# Altium PCB PCB1.PcbDoc
Units mil, origin at the board's own origin, x right, y up, seen from the top; angles counter-clockwise.
Board outline 3150 x 2748.11 mil, 4 copper layers (Top Layer, GROUND, POWER, Bottom Layer), stack 23.756 mil thick; 83 components, 48 nets, 343 pads, 175 vias.
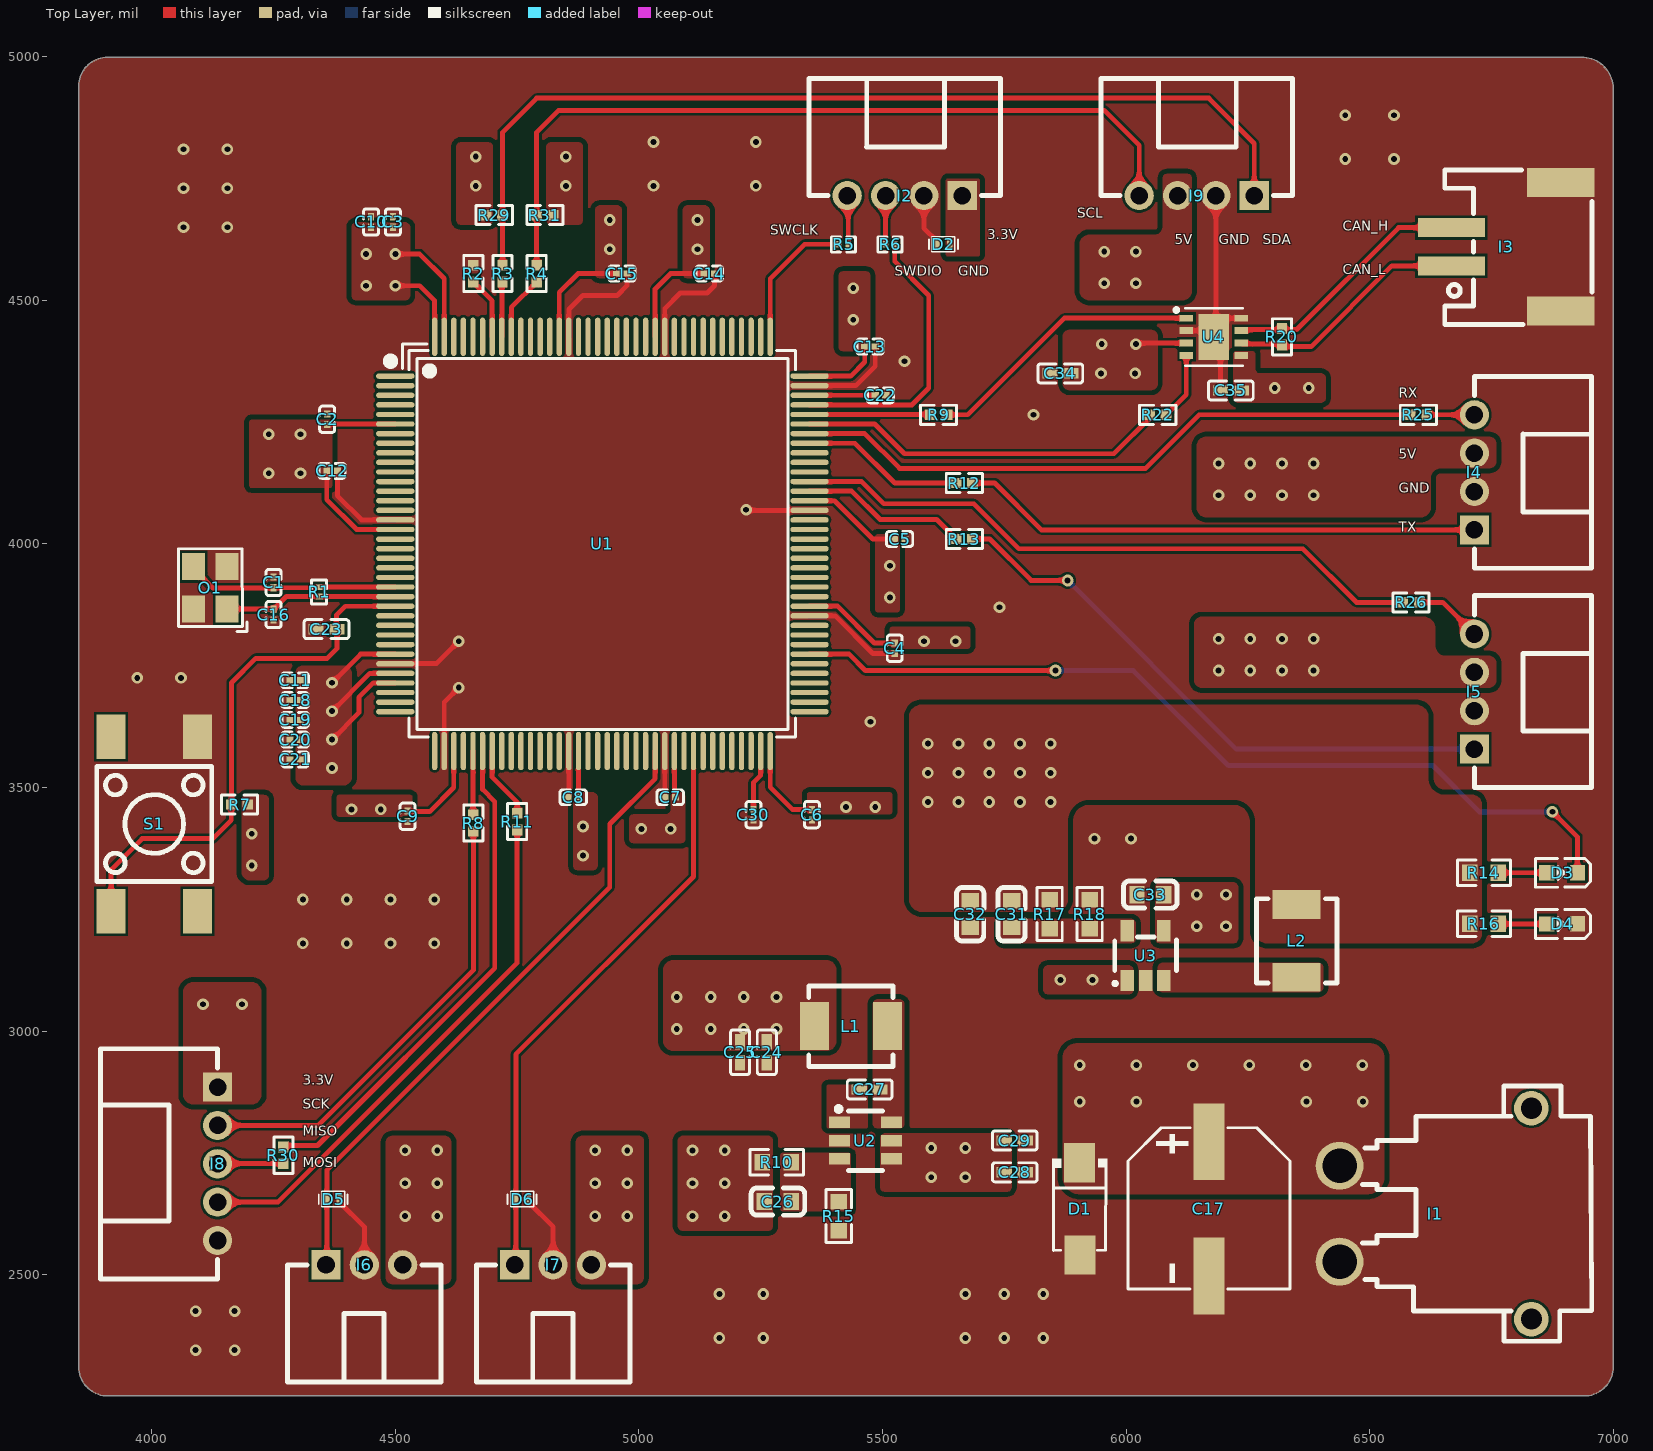
[diagram p0: Top Layer view]
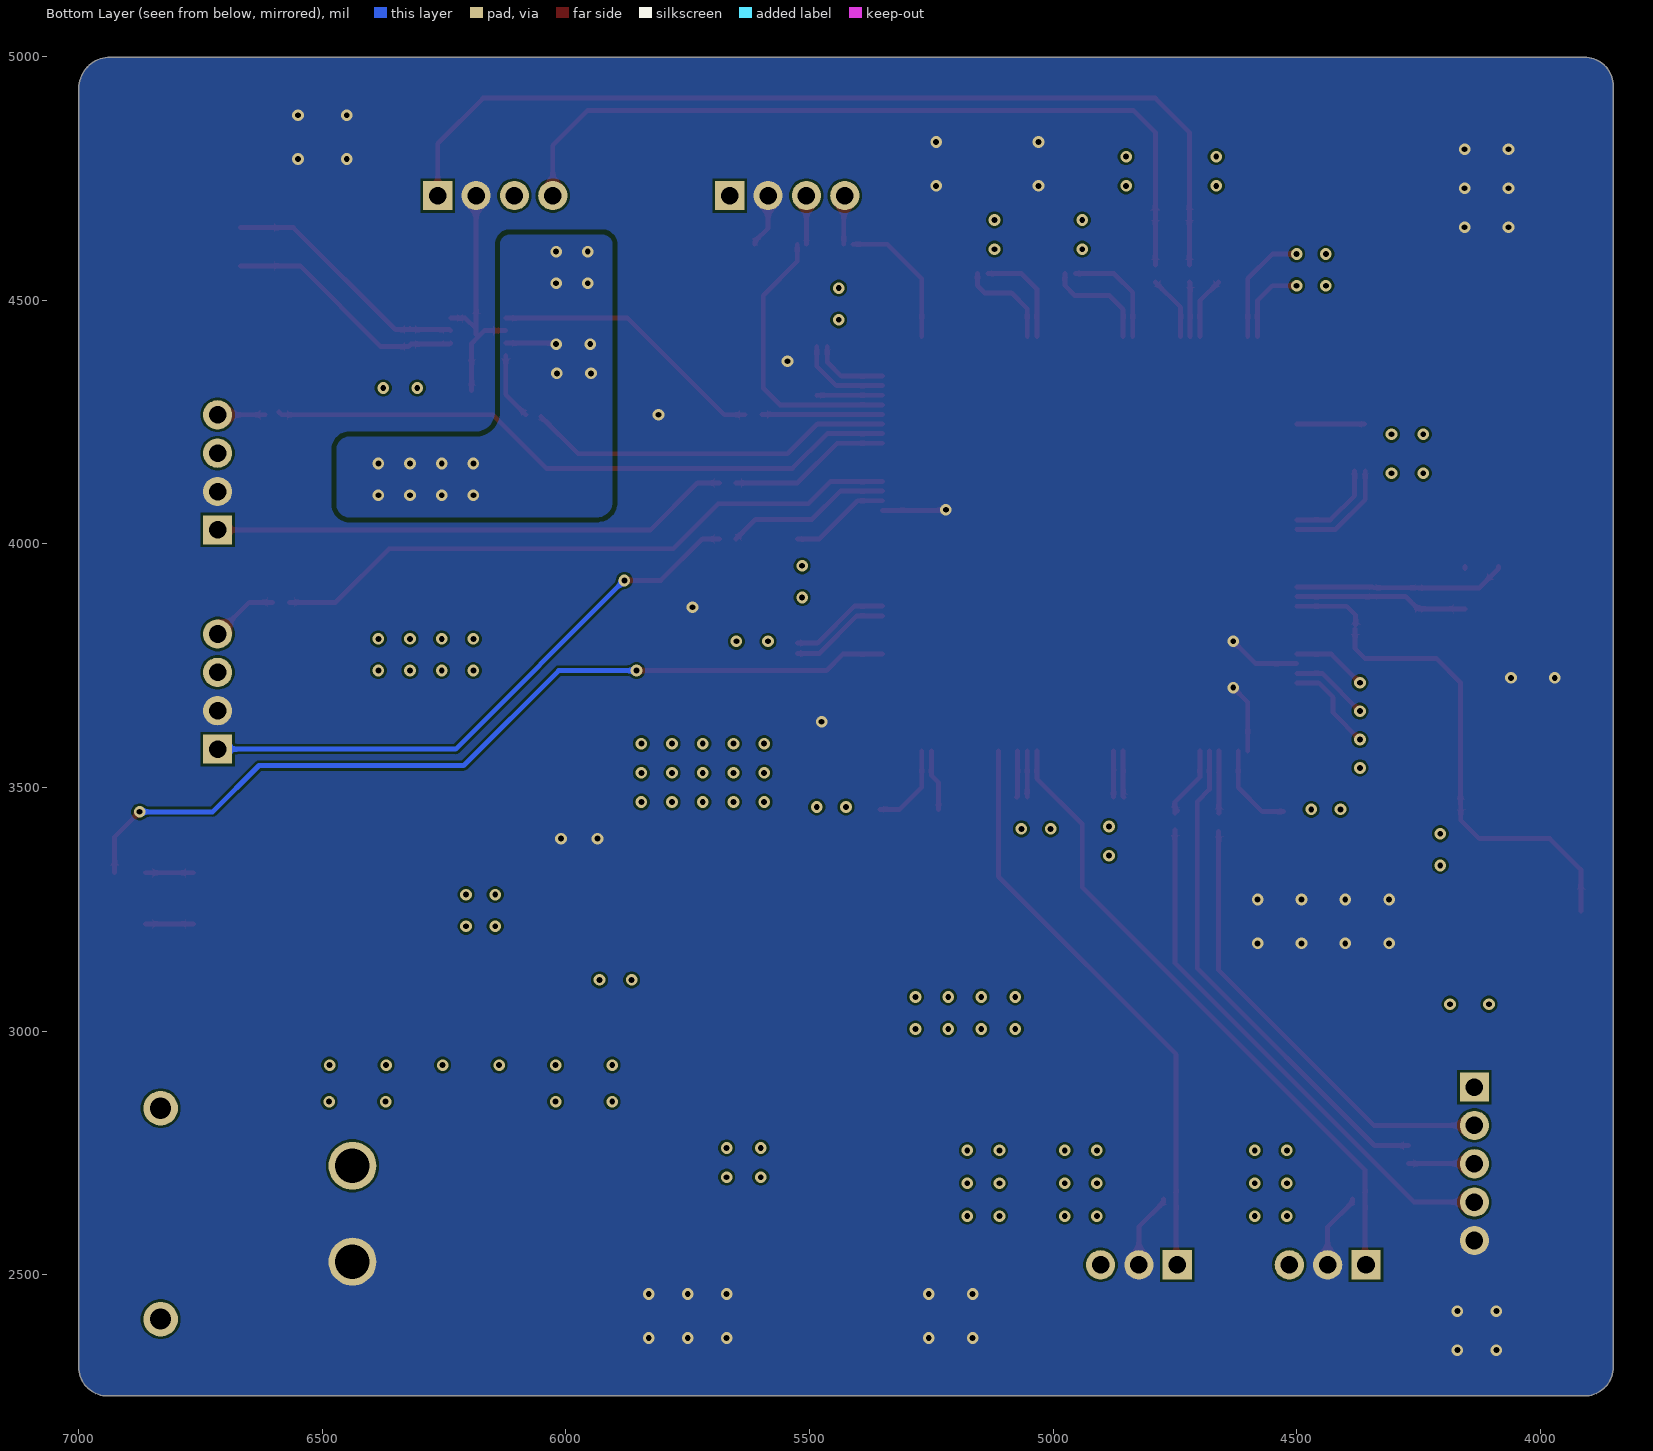
[diagram p1: Bottom Layer view, seen from below]
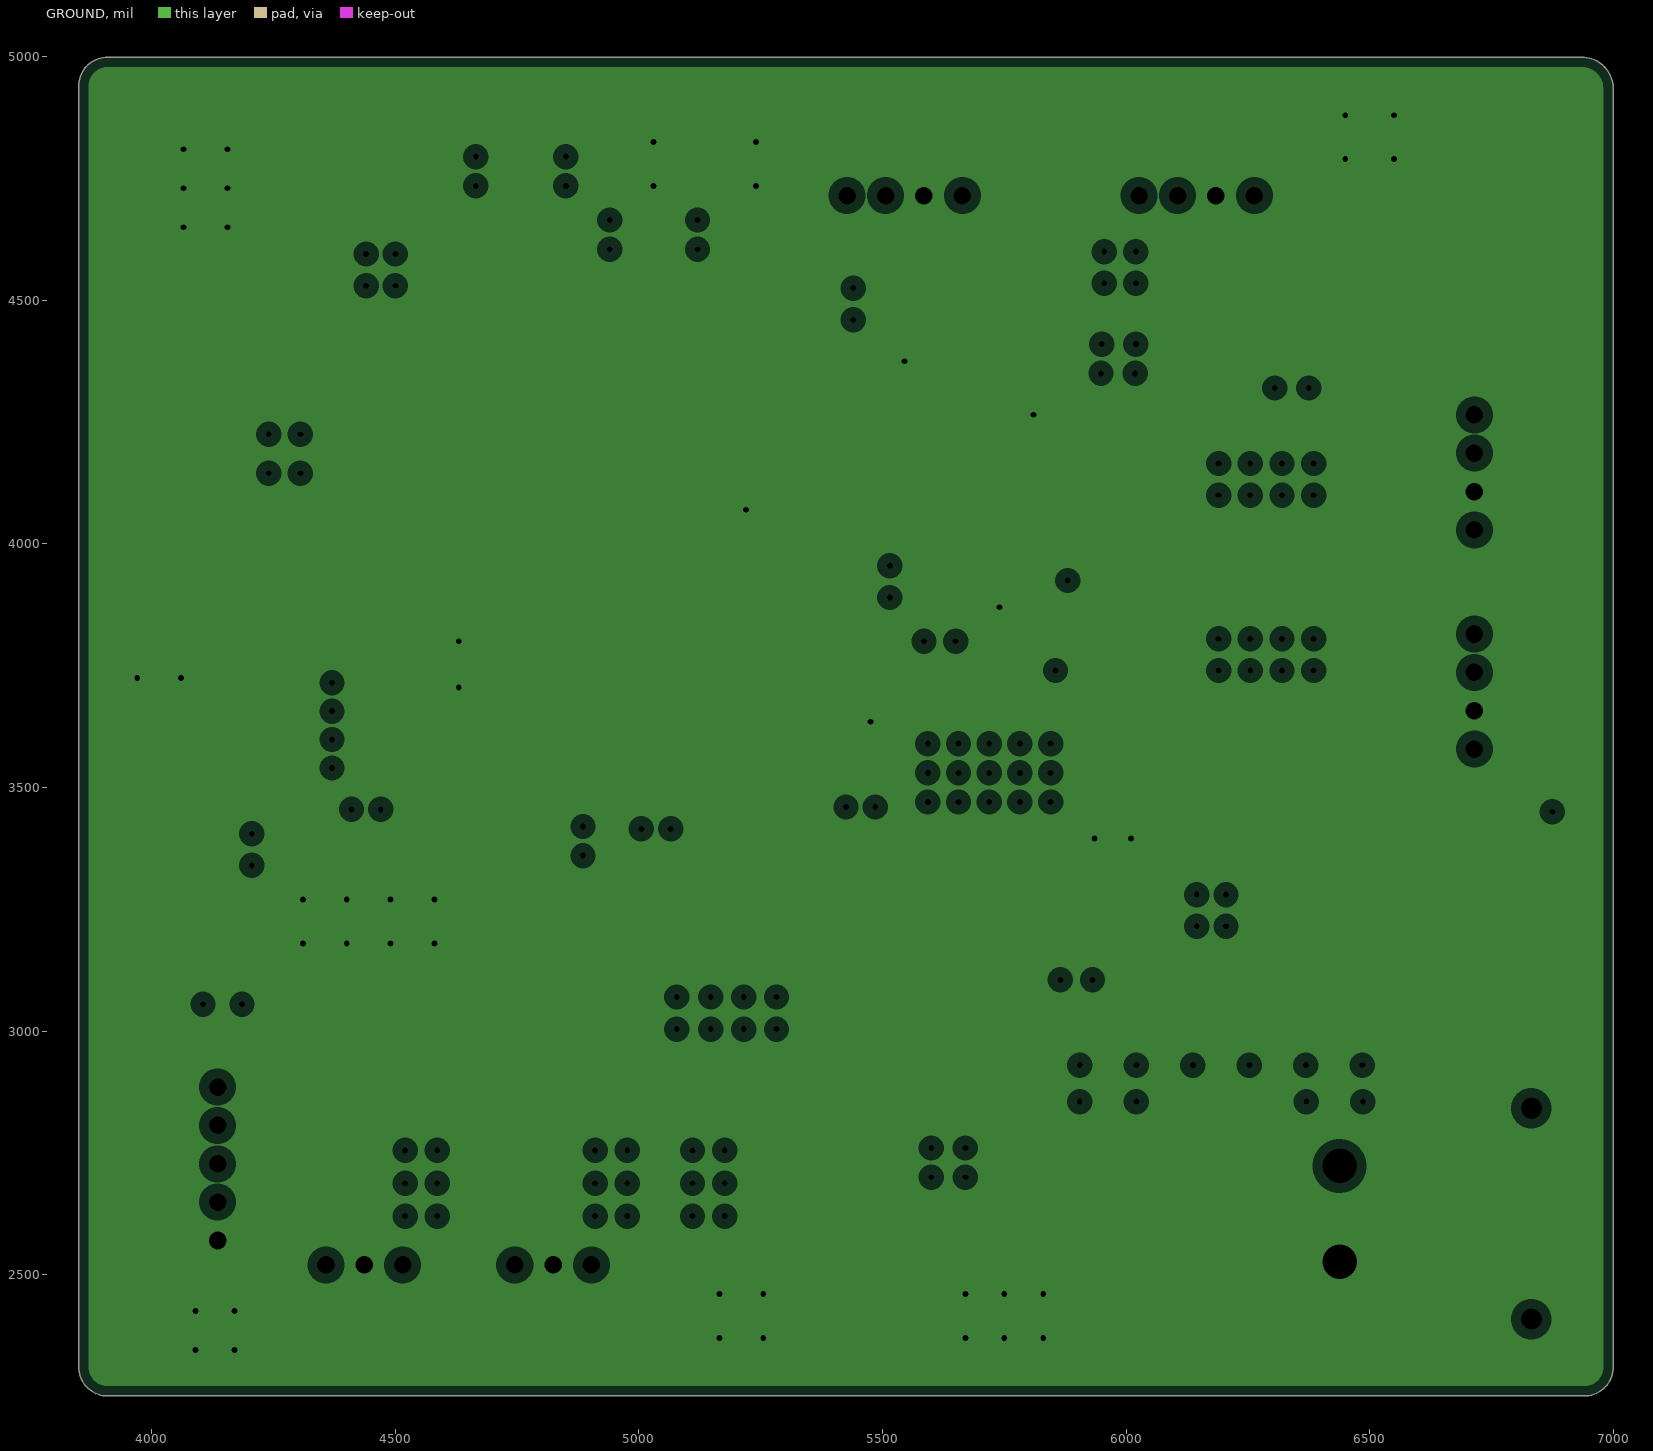
[diagram p2: GROUND, clearances drawn from the general rule]
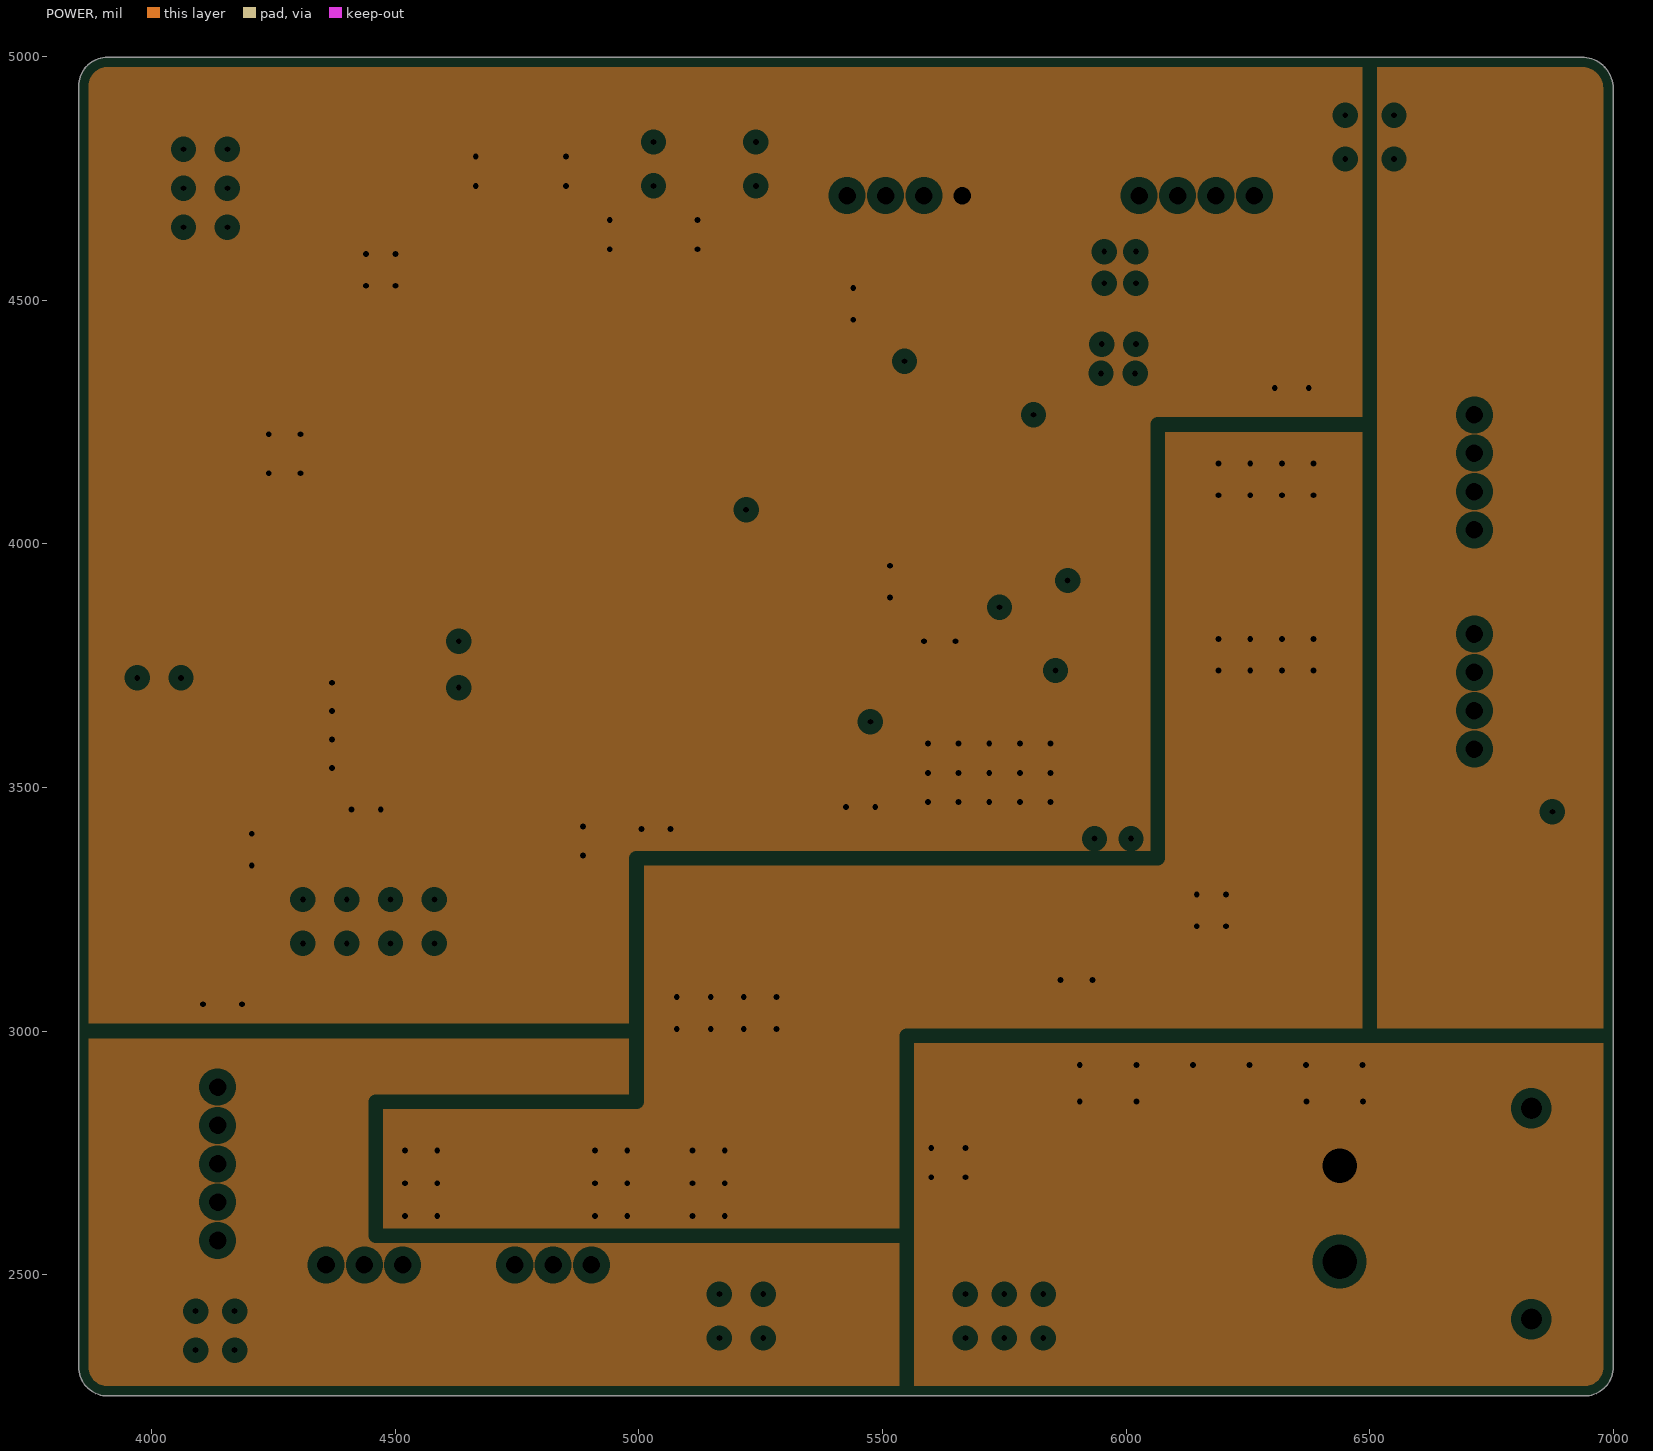
[diagram p3: POWER, clearances drawn from the general rule]

## Layer stack, top to bottom
Top Solder: solder mask 0.4, Solder Resist, Dk 3.5
Top Layer: signal copper 1.4
Dielectric 2: prepreg 2.8, PP-006, Dk 4.1
GROUND: plane copper 1.378, net GND
Dielectric 1: dielectric 12.6, FR-4, Dk 4.8
POWER: plane copper 1.378, net (Multiple Nets)
Dielectric 3: prepreg 2.8, PP-006, Dk 4.1
Bottom Layer: signal copper 1.4
Bottom Solder: solder mask 0.4, Solder Resist, Dk 3.5

## Board outline
3850,2310 ccw(c3909.06,2310) 3909.06,2250.94 6940.94,2250.94 ccw(c6940.94,2310) 7000,2310 7000,4935 ccw(c6935.47,4934.53) 6935,4999.06 3909.06,4999.06 ccw(c3909.06,4940) 3850,4940

## Design rules (kind name [scope] priority, off if disabled: settings)
Clearance [All] p1: gap=5 ignorepadtopadclearanceinfootprint=TRUE except(10: Poly-Poly)
ComponentClearance [All] p1: gap=1 collisioncheckmode=3 verticalgap=10 showdistances=FALSE
DiffPairsRouting DiffPairsRouting_1 [InDifferentialPair ('CAN')] p1: maxlimit=10 minlimit=10 mostfreqgap=10 toplayer_minwidth=10 toplayer_maxwidth=15 toplayer_prefwidth=10 bottomlayer_minwidth=10 bottomlayer_maxwidth=15 bottomlayer_prefwidth=10 maxuncoupledlength=500
DiffPairsRouting [All] p2: maxlimit=10 minlimit=10 mostfreqgap=10 toplayer_minwidth=15 toplayer_maxwidth=15 toplayer_prefwidth=15 bottomlayer_minwidth=15 bottomlayer_maxwidth=15 bottomlayer_prefwidth=15 maxuncoupledlength=500
HoleToHoleClearance [All] p1: gap=1 allowstackedmicrovias=TRUE
MatchedLengths [InDifferentialPair ('CAN')] p1: tolerance=1000 checknetsindiffpair=FALSE checkdiffpairvsdiffpair=TRUE checkxsignals=TRUE checkothers=TRUE
PlaneClearance [All] p1: clearance=20
PlaneConnect [All] p1: planeconnectstyle=Relief reliefexpansion=20 reliefentries=4 reliefconductorwidth=10 reliefairgap=10
PolygonConnect [All] p1: connectstyle=Direct reliefconductorwidth=10 reliefentries=4 polygonreliefangle="90 Angle" airgapwidth=10
RoutingVias [All] p1: holewidth=12 width=24 viastyle="Through Hole" minholewidth=1 minwidth=1 maxholewidth=100 maxwidth=100
SilkToSilkClearance [All] p1: silktosilkclearance=1
SilkToSolderMaskClearance [IsPad] p1: minsilkscreentomaskgap=1 clearancetoexposedcopper=TRUE
SolderMaskExpansion [All] p1: expansion=4 istentingtop=FALSE
Width [All] p1: maxlimit=50 minlimit=5 preferedwidth=10
23 further rules are at their usual default settings.

## Components (designator, comment, footprint, x,y, rotation, side; value= is the part's Value field where it differs from the comment)
C1 "20PF" C_0201 4250,3920.8 r270 top
C2 "100nF" C_0201 4360,4255.8 r270 top
C3 "10uF" C_0201 4495,4660.8 r90 top
C4 "100nF" C_0201 5525,3785.8 r270 top
C5 "100nF" C_0201 5535,4010 r0 top
C6 "100nF" C_0201 5355,3444.2 r270 top
C7 "100nF" C_0201 5064.2,3480 r180 top
C8 "100nF" C_0201 4865,3480 r180 top
C9 "100nF" C_0201 4525,3440.8 r270 top
C10 "100nF" C_0201 4450,4660.8 r90 top
C11 "100nF" C_0201 4294.2,3720 r180 top
C12 "100nF" C_0201 4370,4150 r0 top
C13 "100nF" C_0201 5474.2,4405 r0 top
C14 "100nF" C_0201 5144.2,4555 r0 top
C15 "100nF" C_0201 4965,4555 r0 top
C16 "20PF" C_0201 4250,3855 r90 top
C17 "C_A" C_8*10.5 6170,2635 r270 top
C18 "1uF" C_0201 4294.2,3679.38 r0 top
C19 "100nF" C_0201 4294.2,3638.75 r0 top
C20 "1uF" C_0201 4294.2,3598.13 r180 top
C21 "100nF" C_0201 4294.2,3557.5 r180 top
C22 "2.2uF" C_0201 5495.8,4305 r0 top
C23 "100nF" C_0402 4358.54,3825 r0 top
C24 "22uF" C_0402 5262.5,2956.46 r90 top
C25 "104" C_0402 5207.5,2956.46 r90 top
C26 "220pF" C_0603 5285,2650 r180 top
C27 "104" C_0402 5473.54,2880 r0 top
C28 "104" C_0402 5771.46,2710 r0 top
C29 "22uF" C_0402 5771.46,2775.26 r0 top
C30 "2.2uF" C_0201 5235,3444.2 r90 top
C31 "22pF" C_0603 5765,3240 r90 top
C32 "10uF" C_0603 5680,3240 r90 top
C33 "10uF" C_0603 6050,3280 r0 top
C34 "100nF" C_0402 5865,4350 r0 top
C35 "100nF" C_0402 6215,4315 r0 top
D1 "SMAJ5.0A" SMAJ5.0A 5905,2635 r270 top
D2 "PESD5V0F1BL" PESD5V0F1BL 5625,4615 r0 top
D3 "LED" LED_0603 6900,3325 r180 top
D4 "LED" LED_0603 6900,3220 r180 top
D5 "PESD5V0F1BL" PESD5V0F1BL 4372.2,2655 r0 top
D6 "PESD5V0F1BL" PESD5V0F1BL 4760,2655 r0 top
I1 "XT30PW-M" XT30PW-M 6635,2625 r90 top locked
I2 "PH2.0-4P" PH2.0-4P 5545.63,4715 r180 top
I3 "PH2.0-2P" PH2.0-2P 6780,4610 r90 top
I4 "PH2.0-4P" PH2.0-4P 6715,4146.89 r90 top
I5 "PH2.0-4P" PH2.0-4P 6715,3696.89 r90 top
I6 "PH2.0-3P" PH2.0-3P 4436.26,2520 r0 top
I7 "PH2.0-3P" PH2.0-3P 4823.74,2520 r0 top
I8 "PH2.0-5P" PH2.0-5P 4135,2727.52 r270 top
I9 "PH2.0-4P" PH2.0-4P 6145,4715 r180 top
L1 "3.3uH" L_0402 5435.2,3010 r0 top
L2 "1uH" L_0402 6350,3185 r90 top
O1 "Oscillator" Oscillator 4120,3910 r90 top
R1 "1M" R_0201 4343.57,3901.43 r90 top
R2 "10K" R_0402 4660,4555 r270 top
R3 "12R" R_0402 4720,4555 r270 top
R4 "12R" R_0402 4790,4555 r270 top
R5 "100R" R_0201 5420,4615 r180 top
R6 "100R" R_0201 5515.49,4615 r0 top
R7 "10K" R_0402 4180,3465 r0 top
R8 "12R" R_0402 4660,3427.04 r270 top
R9 "12R" R_0402 5615,4265 r180 top
R10 "73.2K" R_0603 5282.81,2730.42 r180 top
R11 "12R" R_0402 4750,3430 r270 top
R12 "12R" R_0402 5667.96,4125 r180 top
R13 "12R" R_0402 5667.96,4010 r180 top
R14 "1K" R_0603 6734.66,3325 r180 top
R15 "10K" R_0603 5410,2620 r90 top
R16 "1K" R_0603 6734.66,3220 r180 top
R17 "100K" R_0603 5842.92,3240 r90 top
R18 "22.1K" R_0603 5925,3240 r270 top
R20 "120R" R_0402 6320,4425 r90 top
R22 "33R" R_0402 6065,4265 r0 top
R25 "33R" R_0402 6600,4265 r180 top
R26 "33R" R_0402 6585,3880 r180 top
R29 "2.2K" R_0402 4702.96,4675 r180 top
R30 "33R" R_0402 4270,2745 r90 top
R31 "2.2K" R_0402 4807.04,4675 r0 top
S1 "SWITCH-4P" SWITCH-4P 4005,3425 r90 top
U1 "STM32F407ZGT6" STM32F407ZGT6 4925,4000 r270 top
U2 "RY8121" RY8121 5465,2775 r180 top
U3 "SY8089A1AAC" SY8089A1AAC 6040,3155 r270 top
U4 "TJA1044GTK/3Z" TJA1044GTK/3Z 6180,4425 r270 top

## Footprints (in the part's own frame and the unit in brackets; to place one, negate y for a bottom-side part, rotate by r counter-clockwise, add the part's x,y. Pads: shape width x height; smd on the part's side, far side on the other; paste and mask are expansions set on the pad)
C_8*10.5 [mm] "贴片铝电解电容8*10.5"
  rect 4x1.6 smd: 1(-3.5,0) 2(3.5,0)
  silkscreen extent -4.23,-4.23 4.18,4.23
C_0201 [mil] "贴片电容"
  rect 14.51x12.76 smd paste-3937.01 mask+2: 1(-10.8,0) 2(10.8,0)
  silkscreen extent -27,-15 27,15
C_0402 [mm] "贴片电容"
  rect 0.79x0.54 smd paste-100 mask+0.051: 1(-0.545,0) 2(0.545,0)
  silkscreen extent -1.17,-0.5 1.17,0.5
C_0603 [mm] "贴片电容"
  rect 0.8x0.9 smd: 1(-0.7,0) 2(0.7,0)
  silkscreen extent -1.41,-0.71 1.39,0.72
L_0402 [mm] "4.2*4.2*1.8"
  rect 1.5x2.5 smd: 1(-1.9,0) 2(1.9,0)
  silkscreen extent -2.2,-2.1 2.2,2.1
LED_0603 [mm] "发光二极管"
  rect 0.8x0.8 smd: 1(-0.672,-0.003) 2(0.926,0.003)
  silkscreen extent -1.36,-0.75 1.52,0.76
Oscillator [mm] "晶振4P-SMD3325"
  rect 1.4x1.2 smd: 1(-1.1,-0.875) 2(1.1,-0.875) 3(1.1,0.875) 4(-1.1,0.875)
  silkscreen extent -2.29,-1.9 2.03,1.65
PESD5V0F1BL [mm] "双向TVS"
  rect 0.3x0.6 smd paste+0 mask+0.05: 1(-0.325,0) 2(0.325,0)
  silkscreen extent -0.75,-0.4 0.75,0.4
PH2.0-2P [mm] "卧贴"
  rect 1x3.5 smd paste+0 mask+0.05: 1(-1,2.85) 2(1,2.85)
  rect 1.5x3.5 smd paste+0 mask+0.05: 4(3.35,-2.85) 5(-3.35,-2.85)
  silkscreen extent -4.05,-4.47 4,3.2
PH2.0-3P [mil] "弯插"
  rect 60x60 hole 36: 1(-78.74,0)
  round 60 hole 36: 2(0,0) 3(78.74,0)
  silkscreen extent -157,-240 157,0
PH2.0-4P [mil] "弯插"
  rect 60x60 hole 36: 1(-118.11,0)
  round 60 hole 36: 2(-39.37,0) 3(39.37,0) 4(118.11,0)
  silkscreen extent -197,-240 197,0
PH2.0-5P [mil] "弯插"
  rect 60x60 hole 36: 1(-157.48,0)
  round 60 hole 36: 2(-78.74,0) 3(0,0) 4(78.74,0) 5(157.48,0)
  silkscreen extent -236,-240 236,0
R_0201 [mil] "贴片电阻"
  rect 11.93x12.76 smd paste-3937.01 mask+2: 1(-9.51,0) 2(9.51,0)
  silkscreen extent -24,-15 24,15
R_0402 [mm] "贴片电阻"
  rect 0.566x0.54 smd paste-100 mask+0.051: 1(-0.433,0) 2(0.433,0)
  silkscreen extent -0.94,-0.5 0.94,0.5
R_0603 [mil] "贴片电阻"
  rect 31.75x34.02 smd paste-3937.01 mask+2: 1(-29.66,0) 2(29.66,0)
  silkscreen extent -55,-26 55,26
RY8121 [mm] "DC-DC"
  rect 1.1x0.6 smd paste+0 mask+0.051: 1(1.35,-0.95) 2(1.35,0) 3(1.35,0.95) 4(-1.35,0.95) 5(-1.35,0) 6(-1.35,-0.95)
  silkscreen extent -0.9,-1.78 1.52,1.55
SMAJ5.0A [mm] "TVS"
  rect 2.046x1.62 smd: 1(-2.404,-0.009) 2(2.404,0.009)
  silkscreen extent -2.61,-1.44 2.16,1.44
STM32F407ZGT6 [mm] "LQFP-144"
  oval 0.28x2 smd: 1(-8.75,-10.8) 2(-8.25,-10.8) 3(-7.75,-10.8) 4(-7.25,-10.8) 5(-6.75,-10.8) 6(-6.25,-10.8) 7(-5.75,-10.8) 8(-5.25,-10.8) 9(-4.75,-10.8) 10(-4.25,-10.8) 11(-3.75,-10.8) 12(-3.25,-10.8) 13(-2.75,-10.8) 14(-2.25,-10.8) 15(-1.75,-10.8) 16(-1.25,-10.8) 17(-0.75,-10.8) 18(-0.25,-10.8) 19(0.25,-10.8) 20(0.75,-10.8) 21(1.25,-10.8) 22(1.75,-10.8) 23(2.25,-10.8) 24(2.75,-10.8) 25(3.25,-10.8) 26(3.75,-10.8) 27(4.25,-10.8) 28(4.75,-10.8) 29(5.25,-10.8) 30(5.75,-10.8) 31(6.25,-10.8) 32(6.75,-10.8) 33(7.25,-10.8) 34(7.75,-10.8) 35(8.25,-10.8) 36(8.75,-10.8) 73(8.75,10.8) 74(8.25,10.8) 75(7.75,10.8) 76(7.25,10.8) 77(6.75,10.8) 78(6.25,10.8) 79(5.75,10.8) 80(5.25,10.8) 81(4.75,10.8) 82(4.25,10.8) 83(3.75,10.8) 84(3.25,10.8) 85(2.75,10.8) 86(2.25,10.8) 87(1.75,10.8) 88(1.25,10.8) 89(0.75,10.8) 90(0.25,10.8) 91(-0.25,10.8) 92(-0.75,10.8) 93(-1.25,10.8) 94(-1.75,10.8) 95(-2.25,10.8) 96(-2.75,10.8) 97(-3.25,10.8) 98(-3.75,10.8) 99(-4.25,10.8) 100(-4.75,10.8) 101(-5.25,10.8) 102(-5.75,10.8) 103(-6.25,10.8) 104(-6.75,10.8) 105(-7.25,10.8) 106(-7.75,10.8) 107(-8.25,10.8) 108(-8.75,10.8)
  oval 2x0.28 smd: 37(10.8,-8.75) 38(10.8,-8.25) 39(10.8,-7.75) 40(10.8,-7.25) 41(10.8,-6.75) 42(10.8,-6.25) 43(10.8,-5.75) 44(10.8,-5.25) 45(10.8,-4.75) 46(10.8,-4.25) 47(10.8,-3.75) 48(10.8,-3.25) 49(10.8,-2.75) 50(10.8,-2.25) 51(10.8,-1.75) 52(10.8,-1.25) 53(10.8,-0.75) 54(10.8,-0.25) 55(10.8,0.25) 56(10.8,0.75) 57(10.8,1.25) 58(10.8,1.75) 59(10.8,2.25) 60(10.8,2.75) 61(10.8,3.25) 62(10.8,3.75) 63(10.8,4.25) 64(10.8,4.75) 65(10.8,5.25) 66(10.8,5.75) 67(10.8,6.25) 68(10.8,6.75) 69(10.8,7.25) 70(10.8,7.75) 71(10.8,8.25) 72(10.8,8.75) 109(-10.8,8.75) 110(-10.8,8.25) 111(-10.8,7.75) 112(-10.8,7.25) 113(-10.8,6.75) 114(-10.8,6.25) 115(-10.8,5.75) 116(-10.8,5.25) 117(-10.8,4.75) 118(-10.8,4.25) 119(-10.8,3.75) 120(-10.8,3.25) 121(-10.8,2.75) 122(-10.8,2.25) 123(-10.8,1.75) 124(-10.8,1.25) 125(-10.8,0.75) 126(-10.8,0.25) 127(-10.8,-0.25) 128(-10.8,-0.75) 129(-10.8,-1.25) 130(-10.8,-1.75) 131(-10.8,-2.25) 132(-10.8,-2.75) 133(-10.8,-3.25) 134(-10.8,-3.75) 135(-10.8,-4.25) 136(-10.8,-4.75) 137(-10.8,-5.25) 138(-10.8,-5.75) 139(-10.8,-6.25) 140(-10.8,-6.75) 141(-10.8,-7.25) 142(-10.8,-7.75) 143(-10.8,-8.25) 144(-10.8,-8.75)
  silkscreen extent -10.41,-11.25 10.08,10.08
SWITCH-4P [mm] "4P-6*6"
  rect 2.3x1.5 smd: 1(-4.55,2.25) 2(4.55,2.25) 3(-4.55,-2.25) 4(4.55,-2.25)
  silkscreen extent -3,-3 3,3
SY8089A1AAC [mm] "DC-DC-Input2.5V-5.5V"
  rect 1.1x0.7 smd: 1(1.294,-0.951) 2(1.294,-0.001) 3(1.294,0.951) 4(-1.294,0.951) 5(-1.294,-0.949)
  silkscreen extent -0.97,-1.65 1.52,1.61
TJA1044GTK/3Z [mil] "CAN"
  rect 14x28 smd: 1(-38.39,-56.4) 2(-12.79,-56.4) 3(12.8,-56.4) 4(38.39,-56.4) 5(38.39,56.4) 6(12.8,56.4) 7(-12.79,56.4) 8(-38.39,56.4)
  rect 94.49x62.99 smd: 9(0,0)
  silkscreen extent -59,-81 59,59
XT30PW-M [mm] "卧式"
  round 2.5 hole 1.8: 1(-2.5,5) 2(2.5,5)
  round 1.8 hole 1.1: 3(5.5,-5) 4(-5.5,-5)
  silkscreen extent -6.65,-8.15 6.65,3.81

## Part data
C1 C16: library part C, "贴片电容"
C2 C3 C4 C5 C6 C7 C8 C9 C10 C11 C12 C13 C14 C15 C18 C19 C20 C21 C22 C23 C24 C25 C26 C27 C28 C29 C30 C31 C32 C33 C34 C35: library part C, "无极性贴片电容"
C17: "铝电解电容"
D1: "TVS"
D2 D5 D6: "双向TVS"
D3 D4: "发光二极管"
I1: "卧式公头"
I3: "卧贴"
I6 I7: "PH3.0-3P弯插"
I8: "弯插"
L1 L2: library part L, "SMD电感4.2*4.2*1.8"
O1: "晶振"
R1: library part R, "电阻"
R2 R3 R4 R5 R6 R7 R8 R9 R10 R11 R12 R13 R14 R15 R16 R17 R18 R20 R22 R25 R26 R29 R30 R31: library part R, "贴片电阻"
U2 U3: "DC-DC"
U4: "CAN"

## Via types
v1: diameter 24, hole 12, Top Layer to Bottom Layer, tented both sides, 175 vias

## Nets (pads, with @x,y where several pads share a name; then routed paths per layer and width w, separated by ;. In a path a pad name is that pad's centre, name@x,y a point inside that pad or via, vN(x,y) a via of type N, cw(c..) or ccw(c..) an arc to the next point about the centre after c; other vN are vias at no path point)
3.3V: C2.2 C3.1 C4.1 C5.1 C6.1 C7.1 C8.1 C9.1 C10.1 C11.1 C12.1 C13.1 C14.1 C15.1 C18.2 C19.2 C20.1 C21.1 C31.2 C32.2 C35.2 D2.2 I2.1 I8.1 L2.2 R7.2 R14.2 R16.2 R17.2 R29.2 R31.2 U1.6 U1.17 U1.30 U1.32 U1.33 U1.39 U1.52 U1.62 U1.72 U1.84 U1.95 U1.108 U1.121 U1.131 U1.143 U1.144 U4.5 | length 2850.2
  Top Layer w10: C12.1 4359.2,4090.8 4420.4,4029.6 4499.73,4029.6 U1.17 ; C2.2@4360,4246.06 U1.6 U1.6@4499.67,4245.93 ; v1(4370,3598.33) 4425,3653.33 4425,3685 4454.57,3714.57 U1.33 ; v1(4370,3656.67) 4447.58,3734.25 U1.32 ; v1(4370,3715) 4428.62,3773.62 U1.30 ; v1(4500,4530) 4550,4530 4580.51,4499.49 U1.144 ; v1(4500,4595) 4550,4595 4600.2,4544.8 U1.143 ; C9.1@4526.38,3450.52 4570.52,3450.52 4619.88,3499.88 U1.39 ; U1.131 4836.42,4516.42 4875,4555 C15.1 ; C8.1 U1.52 ; U1.121 5033.27,4523.27 5065,4555 C14.1 ; U1.62 5072.64,3487.24 5072.75,3487.13 5072.75,3481.38 5074.13,3480 C7.1 ; U1.72 5269.49,3500.51 5315,3455 C6.1 ; U1.84 5350.4,3872.25 5407.75,3872.25 5483.4,3796.6 C4.1 ; U1.95 5401.42,4088.58 5480,4010 C5.1 ; U1.108 5434.49,4344.49 5463.4,4373.4 C13.1
  other v1: 4105,3055 4185,3055 4205,3340 4885,3360 4205,3405 5005,3415 5065,3415 4885,3420 4410,3455 4470,3455 5425,3460 5485,3460 5593,3470 5656,3470 5719,3470 5782,3470 5845,3470 5593,3530 5656,3530 5719,3530 5782,3530 5845,3530 4370,3540 5593,3590 5656,3590 5719,3590 5782,3590 5845,3590 5585,3800 5650,3800 5515,3890 5515,3955 4240,4145 4305,4145 4240,4225 4305,4225 6305,4320 6375,4320 5440,4460 5440,4525 4440,4530 4440,4595 4940,4605 5120,4605 4940,4665 5120,4665 4665,4735 4850,4735 4665,4795 4850,4795
+5: C24.2 C25.2 C26.2 C33.2 C34.2 I4.3 I5.3 I6.3 I7.3 I9.3 L1.1 R10.2 U3.1 U3.4 U4.3 | length 104.9
  Top Layer w10: v1(6020,4410) cw(c6022.2,4410) 6022.2,4412.2 U4.3
  other v1: 4520,2620 4586.01,2620 4910,2620 4976.01,2620 5110,2620 5176.01,2620 4520,2687.5 4586.01,2687.5 4910,2687.5 4976.01,2687.5 5110,2687.5 5176.01,2687.5 4520,2755 4586.01,2755 4910,2755 4976.01,2755 5110,2755 5176.01,2755 5077.5,3003.99 5147.5,3003.99 5215,3003.99 5282.5,3003.99 5077.5,3070 5147.5,3070 5215,3070 5282.5,3070 5865,3105 5931.01,3105 6145,3215 6205,3215 6145,3280 6205,3280 6190,3740 6255,3740 6320,3740 6385,3740 6190,3805 6255,3805 6320,3805 6385,3805 6190,4100 6255,4100 6320,4100 6385,4100 6190,4165 6255,4165 6320,4165 6385,4165 5948.54,4350 6018.54,4350 5950,4410 5955,4535 6020,4535 5955,4600 6020,4600
CAN1_H: I3.2 R20.2 U4.7 | length 522.2
  Top Layer w10: U4.7 6238.4,4439.79 R20.2@6317.75,4439.79 ; R20.2 R20.2@6317.75,4439.79 ; I3.2 6559.37,4649.37 6349.79,4439.79 R20.2@6317.75,4439.79
CAN1_RX: R22.1 U1.103 | length 758.3
  Top Layer w10: U1.103 5483.94,4246.06 5545,4185 5975,4185 R22.1@6051.48,4261.48
CAN1_TX: R9.1 U4.1 | length 573.7
  Top Layer w10: R9.1 5675,4265 5873.39,4463.39 U4.1
CAN2_L: I3.1 R20.1 U4.6 | length 503
  Top Layer w10: U4.6 6238.4,4410.2 6317.76,4410.2 R20.1 6322.96,4405 6380,4405 6545.63,4570.63 I3.1
GND: C1.1 C2.1 C3.2 C4.2 C5.2 C6.2 C7.2 C8.2 C9.2 C10.2 C11.2 C12.2 C13.2 C14.2 C15.2 C16.1 C17.2 C18.1 C19.1 C20.2 C21.2 C22.2 C23.1 C24.1 C25.1 C28.2 C29.2 C30.1 C32.1 C33.1 C34.1 C35.1 D1.2 D2.1 D4.1 D5.2 D6.2 I1.1 I2.2 I3.4 I3.5 I4.2 I5.2 I6.2 I7.2 I8.5 I9.2 O1.2 O1.4 R2.1 R15.1 R18.1 S1.4 U1.16 U1.31 U1.38 U1.51 U1.61 U1.83 U1.94 U1.107 U1.120 U1.130 U2.2 U3.2 U4.2 U4.8 U4.9 | length 2584
  Top Layer w10: O1.2@4154.45,3949.37 O1.2 ; C12.2 4380.8,4099.2 4430.79,4049.21 U1.16 ; D5.2 4385,2649.09 4436.26,2597.83 I6.2 ; U1.31 4500,3754.14 4584.14,3754.14 v1(4630,3800) ; U1.38 4600.2,3675.2 v1(4630,3705) ; D6.2 4772.8,2649.09 4823.74,2598.15 I7.2 ; C8.2 4854.72,3480 4856.1,3481.38 U1.51 ; U1.130 4856.1,4481.1 4885,4510 4955,4510 4975.8,4530.8 C15.2 ; C7.2@5052.95,3480.45 U1.61 ; U1.120 5052.95,4482.95 5085,4515 5140,4515 5155,4530 C14.2 ; v1(5220,4070) 5221.1,4068.9 U1.94 ; U1.83 5402.64,3852.36 5480,3775 C4.2 ; U1.107 5444.8,4324.8 5485,4365 C13.2 ; I2.2 5585,4648.11 5612.2,4620.91 D2.1 ; U4.2 6167.21,4437.79 U4.9 ; I9.2 U4.9@6184.37,4441.26 ; C35.1 6193.54,4411.46 U4.9 ; U4.8 6206.5,4463.39 U4.9@6184.37,4441.26 ; U4.9 6184.37,4429.37 U4.9@6184.37,4441.26
  other v1: 4090,2345 4170,2345 5165,2370 5255,2370 5670,2370 5750,2370 5830,2370 4090,2425 4170,2425 5165,2460 5255,2460 5670,2460 5750,2460 5830,2460 4310,3180 4400,3180 4490,3180 4580,3180 4310,3270 4400,3270 4490,3270 4580,3270 5935,3395 6010,3395 5475,3635 3970,3725 4060,3725 5740,3870 5810,4265 5545,4375 4065,4650 4155,4650 4065,4730 4155,4730 5030,4735 5240,4735 6450,4790 6550,4790 4065,4810 4155,4810 5030,4825 5240,4825 6450,4880 6550,4880
I2C1_SCL: I9.4 R4.1 R31.1 | length 1661.4
  Top Layer w10: R4.1 R31.1 4790,4845 4835,4890 5955,4890 6026.89,4818.11 I9.4
I2C1_SDA: I9.1 R3.1 R29.1 | length 1990.5
  Top Layer w10: R3.1 4720,4845 4790,4915 6170,4915 6263.11,4821.89 I9.1
LED: D3.1 U1.79 | length 1805
  Top Layer w10: U1.79 5431.38,3773.62 5465,3740 v1(5855,3740) ; v1(6875,3450) 6926.48,3398.53 D3.1
  Bottom Layer w10: v1(5855,3740) 6015,3740 6210,3545 6630,3545 6725,3450 v1(6875,3450)
NetC22_1: C22.1 U1.106 | length 134.8
  Top Layer w10: U1.106 5350.26,4305.06 5484.94,4305.06 C22.1
NetC26_1: C26.1 R10.1 R15.2 U2.3
NetC27_1: C27.1 U2.1
NetC27_2: C27.2 L1.2 U2.6
NetC30_2: C30.2 U1.71 | length 125.9
  Top Layer w10: C30.2 5235,3510 5249.8,3524.8 U1.71
NetC31_1: C31.1 R17.1 R18.2 U3.5
NetD3_2: D3.2 R14.1 | length 99.3
  Top Layer w10: R14.1 6863.52,3325 D3.2
NetD4_2: D4.2 R16.1 | length 99.3
  Top Layer w10: R16.1 6863.52,3220 D4.2
NetI2_3: I2.3 R6.1 | length 100.1
  Top Layer w10: R6.1 5506.12,4615.14 5506.12,4714.86 I2.3
NetI2_4: I2.4 R5.1 | length 100.8
  Top Layer w10: I2.4 5429.51,4713.01 R5.1
NetI4_4: I4.4 R25.1 | length 98
  Top Layer w10: R25.1 I4.4
NetI5_4: I5.4 R26.1 | length 139.9
  Top Layer w10: R26.1 6650,3880 I5.4
NetI8_3: I8.3 R30.1 | length 134.6
  Top Layer w10: I8.3@4135.44,2727.96 R30.1
NetL2_1: L2.1 U3.3
NetR2_2: R2.2 U1.138 | length 128.8
  Top Layer w10: R2.2 4660,4537.45 4698.62,4498.84 U1.138
NetR3_2: R3.2 U1.137 | length 113.5
  Top Layer w10: U1.137 4718.51,4425.4 4718.51,4536.47 R3.2
NetR4_2: R4.2 U1.136 | length 134.3
  Top Layer w10: U1.136 4737.99,4485.44 4790,4537.45 R4.2
NetR8_1: R8.1 U1.41 | length 128.1
  Top Layer w10: U1.41 4659.45,3574.6 4659.45,3447.59 R8.1@4660,3447.04
NetR9_2: R9.2 U1.104 | length 247.8
  Top Layer w10: U1.104 R9.2@5597.96,4265.75
NetR11_1: R11.1 U1.43 | length 157
  Top Layer w10: U1.43 4698.62,3521.38 4750,3470 R11.1 R11.1@4744.37,3452.67
NetR12_2: R12.2 U1.101 | length 334.6
  Top Layer w10: U1.101 5443.31,4206.69 5525,4125 R12.2
NetR13_2: R13.2 U1.96 | length 341.4
  Top Layer w10: U1.96 5436.73,4108.27 5495,4050 5610.92,4050 R13.2
NetR22_2: R22.2 U4.4 | length 138.8
  Top Layer w10: R22.2 6123.6,4306.56 U4.4
NRST: C23.2 R7.1 S1.1 U1.25 | length 1090.3
  Top Layer w10: S1.1 3916.41,3331.41 3980,3395 4125,3395 4162.96,3432.96 R7.1 ; R7.1@4163.54,3465 4163.54,3715 4213.65,3765.11 4360.11,3765.11 4380,3785 C23.2 ; C23.2@4378.77,3833.77 4378.77,3853.77 4397.05,3872.05 U1.25
OSC_IN: C1.2 O1.3 R1.2 U1.23 | length 434.6
  Top Layer w10: O1.3 4085.55,3949.37 4125.39,3909.53 C1.2@4249.53,3909.53 ; C1.2 4342.62,3910 R1.2 ; R1.2@4343.57,3911.42 U1.23
OSC_OUT: C16.2 O1.1 R1.1 U1.24 | length 357.3
  Top Layer w10: O1.1 4249.11,3866.69 cw(c4249.11,3865.8) C16.2 4250,3866.67 4251.38,3868.05 4252.25,3868.05 4276.12,3891.92 4343.37,3891.92 4343.57,3891.73 U1.24
SPI1_MISO: R30.2 U1.42 | length 1041
  Top Layer w10: R30.2@4270,2765 4340,2765 4704.08,3129.08 4704.08,3470.92 4678.94,3496.06 U1.42
SPI1_MOSI: I8.4 R11.2 | length 1091.4
  Top Layer w10: I8.4 4258.78,2648.78 4750,3140 R11.2
SPI1_SCK: I8.2 R8.2 | length 942
  Top Layer w10: I8.2 4341.26,2806.26 4660,3125 R8.2
SWCLK: R5.2 U1.109 | length 289.5
  Top Layer w10: U1.109 5269.49,4544.49 5340,4615 R5.2
SWDIO: R6.2 U1.105 | length 583.1
  Top Layer w10: U1.105 5560.43,4285.43 5595,4320 5595,4510 5525,4580 R6.2
TIM1_CH1: D5.1 I6.1 U1.60 | length 1334.7
  Top Layer w10: I6.1 4359.41,2521.89 D5.1 4359.41,2714.41 4940,3295 4940,3425 5033.27,3518.27 U1.60
TIM1_CH2: D6.1 I7.1 U1.64 | length 1206.8
  Top Layer w10: I7.1 4747.2,2522.2 D6.1 4747.2,2952.2 5112.01,3317.01 U1.64
USART1_RX: R25.2 U1.102 | length 1316.9
  Top Layer w10: U1.102 5463.62,4226.38 5535,4155 6040,4155 6150,4265 R25.2 6583.47,4265 6589.1,4270.63 R25.2@6589.1,4271.14
USART1_TX: I4.1 R12.1 | length 1069.9
  Top Layer w10: R12.1 5730,4125 5826.22,4028.78 I4.1
USART6_RX: R26.2 U1.97 | length 1320.5
  Top Layer w10: U1.97 5457.05,4127.95 5502.5,4082.5 5687.5,4082.5 5780,3990 6362.96,3990 6472.96,3880 R26.2
USART6_TX: I5.1 R13.1 | length 1208.6
  Top Layer w10: R13.1 5720,4010 5805,3925 v1(5880,3925)
  Bottom Layer w10: v1(5880,3925) 6226.22,3578.78 I5.1
VCC: C17.1 C28.1 C29.1 D1.1 I1.2 U2.4 U2.5
  other v1: 5600,2700 5670,2700 5600,2760 5670,2760 5905,2855 6021.01,2855 6370,2855 6486.01,2855 5905,2930 6021.01,2930 6137.01,2930 6253.02,2930 6369.02,2930 6485.03,2930
pads on no net: I1.3 I1.4 S1.2 S1.3 U1.1 U1.2 U1.3 U1.4 U1.5 U1.7 U1.8 U1.9 U1.10 U1.11 U1.12 U1.13 U1.14 U1.15 U1.18 U1.19 U1.20 U1.21 U1.22 U1.26 U1.27 U1.28 U1.29 U1.34 U1.35 U1.36 U1.37 U1.40 U1.44 U1.45 U1.46 U1.47 U1.48 U1.49 U1.50 U1.53 U1.54 U1.55 U1.56 U1.57 U1.58 U1.59 U1.63 U1.65 U1.66 U1.67 U1.68 U1.69 U1.70 U1.73 U1.74 U1.75 U1.76 U1.77 U1.78 U1.80 U1.81 U1.82 U1.85 U1.86 U1.87 U1.88 U1.89 U1.90 U1.91 U1.92 U1.93 U1.98 U1.99 U1.100 U1.110 U1.111 U1.112 U1.113 U1.114 U1.115 U1.116 U1.117 U1.118 U1.119 U1.122 U1.123 U1.124 U1.125 U1.126 U1.127 U1.128 U1.129 U1.132 U1.133 U1.134 U1.135 U1.139 U1.140 U1.141 U1.142

## Polygon pours and split planes (outlines as drawn)
GND on Top Layer "GND_L01_P114" (solid, remove dead copper, pour order 114): 3850,2310 ccw(c3909.06,2310) 3909.06,2250.94 6940.94,2250.94 ccw(c6940.94,2310) 7000,2310 7000,4935 ccw(c6935.47,4934.53) 6935,4999.06 3909.06,4999.06 ccw(c3909.06,4940) 3850,4940
3.3V on Top Layer "NONET_L01_P-001" (solid, remove dead copper, pour order 69): 4530,3440 4385,3440 cw(c4385,3445) 4380,3445 4380,3480 cw(c4385,3480) 4385,3485 4530,3485 cw(c4530,3480) 4535,3480 4535,3445 cw(c4530,3445)
+5 on Top Layer "NONET_L01_P-001" (solid, remove dead copper, pour order 56): 4480,2770 cw(c4495,2770) 4495,2785 4600,2785 cw(c4600,2770) 4615,2770 4615,2495 cw(c4600,2495) 4600,2480 4495,2480 cw(c4495,2495) 4480,2495
3.3V on Top Layer "NONET_L01_P-001" (solid, remove dead copper, pour order 112): 4700,4815 ccw(c4690,4815) 4690,4825 4635,4825 ccw(c4635,4815) 4625,4815 4625,4665 ccw(c4635,4665) 4635,4655 4690,4655 ccw(c4690,4665) 4700,4665
3.3V on Top Layer "NONET_L01_P-001" (solid, remove dead copper, pour order 109): 5555,3270 ccw(c5580,3270) 5580,3245 5855,3245 ccw(c5855,3270) 5880,3270 5880,3430 cw(c5925,3430) 5925,3475 6220,3475 cw(c6220,3430) 6265,3430 6265,3205 ccw(c6290,3205) 6290,3180 6710,3180 ccw(c6710,3200) 6730,3200 6730,3465 ccw(c6710,3465) 6710,3485 6655,3485 cw(c6655,3520) 6620,3520 6620,3645 ccw(c6595,3645) 6595,3670 5580,3670 ccw(c5580,3645) 5555,3645
3.3V on Top Layer "NONET_L01_P-001" (solid, remove dead copper, pour order 101): 4065,2870 ccw(c4085,2870) 4085,2850 4205,2850 ccw(c4205,2870) 4225,2870 4225,3080 ccw(c4205,3080) 4205,3100 4085,3100 ccw(c4085,3080) 4065,3080
3.3V on Top Layer "NONET_L01_P-001" (solid, remove dead copper, pour order 100): 4185,3475 4185,3325 ccw(c4200,3325) 4200,3310 4230,3310 ccw(c4230,3320) 4240,3320 4240,3475 ccw(c4230,3475) 4230,3485 4195,3485 ccw(c4195,3475)
3.3V on Top Layer "NONET_L01_P-001" (solid, remove dead copper, pour order 99): 4370,4120 cw(c4365,4120) 4365,4115 4205,4115 cw(c4205,4120) 4200,4120 4200,4250 cw(c4205,4250) 4205,4255 4365,4255 cw(c4365,4250) 4370,4250
3.3V on Top Layer "NONET_L01_P-001" (solid, remove dead copper, pour order 96): 6220,4300 ccw(c6230,4300) 6230,4290 6400,4290 ccw(c6400,4300) 6410,4300 6410,4340 ccw(c6400,4340) 6400,4350 6275,4350 cw(c6275,4360) 6265,4360 6265,4390 ccw(c6260,4390) 6260,4395 6225,4395 ccw(c6225,4390) 6220,4390
+5 on Top Layer "NONET_L01_P-001" (solid, remove dead copper, pour order 93): 5870,4425 cw(c5885,4425) 5885,4440 6050,4440 cw(c6050,4425) 6065,4425 6065,4330 cw(c6050,4330) 6050,4315 5885,4315 cw(c5885,4330) 5870,4330
+5 on Top Layer "NONET_L01_P-001" (solid, remove dead copper, pour order 92): 6075,4650 cw(c6060,4650) 6060,4635 5925,4635 ccw(c5925,4615) 5905,4615 5905,4520 ccw(c5925,4520) 5925,4500 6115,4500 ccw(c6115,4520) 6135,4520 6135,4750 ccw(c6125,4750) 6125,4760 6085,4760 ccw(c6085,4750) 6075,4750
+5 on Top Layer "NONET_L01_P-001" (solid, remove dead copper, pour order 91): 6165,4220 ccw(c6165,4200) 6145,4200 6145,4075 ccw(c6165,4075) 6165,4055 6605,4055 ccw(c6605,4075) 6625,4075 6625,4135 cw(c6645,4135) 6645,4155 6745,4155 ccw(c6745,4170) 6760,4170 6760,4205 ccw(c6745,4205) 6745,4220
+5 on Top Layer "NONET_L01_P-001" (solid, remove dead copper, pour order 90): 6610,3850 cw(c6610,3825) 6635,3825 6635,3790 ccw(c6655,3790) 6655,3770 6745,3770 cw(c6745,3755) 6760,3755 6760,3720 cw(c6745,3720) 6745,3705 6155,3705 cw(c6155,3720) 6140,3720 6140,3835 cw(c6155,3835) 6155,3850
3.3V on Top Layer "NONET_L01_P-001" (solid, remove dead copper, pour order 80): 4810,4815 cw(c4820,4815) 4820,4825 4875,4825 cw(c4875,4815) 4885,4815 4885,4665 cw(c4875,4665) 4875,4655 4820,4655 cw(c4820,4665) 4810,4665
3.3V on Top Layer "NONET_L01_P-001" (solid, remove dead copper, pour order 82): 5145,4685 ccw(c5135,4685) 5135,4695 5100,4695 ccw(c5100,4685) 5090,4685 5090,4555 ccw(c5100,4555) 5100,4545 5135,4545 ccw(c5135,4555) 5145,4555
3.3V on Top Layer "NONET_L01_P-001" (solid, remove dead copper, pour order 81): 4965,4685 ccw(c4955,4685) 4955,4695 4920,4695 ccw(c4920,4685) 4910,4685 4910,4555 ccw(c4920,4555) 4920,4545 4955,4545 ccw(c4955,4555) 4965,4555
3.3V on Top Layer "NONET_L01_P-001" (solid, remove dead copper, pour order 77): 4520,4660 cw(c4520,4650) 4530,4650 4530,4510 cw(c4520,4510) 4520,4500 4420,4500 cw(c4420,4510) 4410,4510 4410,4650 cw(c4420,4650) 4420,4660
3.3V on Top Layer "NONET_L01_P-001" (solid, remove dead copper, pour order 76): 5630,4595 ccw(c5635,4595) 5635,4590 5695,4590 ccw(c5695,4595) 5700,4595 5700,4745 ccw(c5695,4745) 5695,4750 5635,4750 ccw(c5635,4745) 5630,4745
3.3V on Top Layer "NONET_L01_P-001" (solid, remove dead copper, pour order 75): 5475,4405 5475,4550 ccw(c5465,4550) 5465,4560 5420,4560 ccw(c5420,4550) 5410,4550 5410,4405 ccw(c5420,4405) 5420,4395 5465,4395 ccw(c5465,4405)
3.3V on Top Layer "NONET_L01_P-001" (solid, remove dead copper, pour order 73): 5065,3480 5065,3455 cw(c5055,3455) 5055,3445 4990,3445 ccw(c4990,3435) 4980,3435 4980,3395 ccw(c4990,3395) 4990,3385 5085,3385 ccw(c5085,3395) 5095,3395 5095,3480 ccw(c5085,3480) 5085,3490 5075,3490 ccw(c5075,3480)
3.3V on Top Layer "NONET_L01_P-001" (solid, remove dead copper, pour order 71): 5675,3785 ccw(c5675,3790) 5680,3790 5680,3825 ccw(c5675,3825) 5675,3830 5520,3830 ccw(c5520,3825) 5515,3825 5515,3790 ccw(c5520,3790) 5520,3785
3.3V on Top Layer "NONET_L01_P-001" (solid, remove dead copper, pour order 70): 5535,4015 5535,3865 cw(c5530,3865) 5530,3860 5490,3860 cw(c5490,3865) 5485,3865 5485,4015 cw(c5490,4015) 5490,4020 5530,4020 cw(c5530,4015)
3.3V on Top Layer "NONET_L01_P-001" (solid, remove dead copper, pour order 67): 4865,3340 ccw(c4875,3340) 4875,3330 4905,3330 ccw(c4905,3340) 4915,3340 4915,3480 ccw(c4905,3480) 4905,3490 4875,3490 ccw(c4875,3480) 4865,3480
3.3V on Top Layer "NONET_L01_P-001" (solid, remove dead copper, pour order 65): 5345,3450 ccw(c5350,3450) 5350,3445 5515,3445 ccw(c5515,3450) 5520,3450 5520,3485 ccw(c5515,3485) 5515,3490 5350,3490 ccw(c5350,3485) 5345,3485
3.3V on Top Layer "NONET_L01_P-001" (solid, remove dead copper, pour order 64): 4295,3520 ccw(c4310,3520) 4310,3505 4395,3505 ccw(c4395,3520) 4410,3520 4410,3735 ccw(c4395,3735) 4395,3750 4310,3750 ccw(c4310,3735) 4295,3735
+5 on Top Layer "NONET_L01_P-001" (solid, remove dead copper, pour order 57): 4870,2770 cw(c4885,2770) 4885,2785 5000,2785 cw(c5000,2775) 5010,2775 5010,2495 cw(c4995,2495) 4995,2480 4885,2480 cw(c4885,2495) 4870,2495
+5 on Top Layer "NONET_L01_P-001" (solid, remove dead copper, pour order 36): 6060,3190 ccw(c6070,3190) 6070,3180 6220,3180 ccw(c6220,3190) 6230,3190 6230,3295 ccw(c6220,3295) 6220,3305 6070,3305 ccw(c6070,3295) 6060,3295
+5 on Top Layer "NONET_L01_P-001" (solid, remove dead copper, pour order 40): 5080,2600 ccw(c5090,2600) 5090,2590 5265,2590 ccw(c5265,2600) 5275,2600 5275,2775 ccw(c5265,2775) 5265,2785 5090,2785 ccw(c5090,2775) 5080,2775
+5 on Top Layer "NONET_L01_P-001" (solid, remove dead copper, pour order 41): 5050,2980 ccw(c5070,2980) 5070,2960 5385,2960 ccw(c5385,2980) 5405,2980 5405,3125 ccw(c5385,3125) 5385,3145 5070,3145 ccw(c5070,3125) 5050,3125
+5 on Top Layer "NONET_L01_P-001" (solid, remove dead copper, pour order 46): 5840,3075 cw(c5840,3085) 5830,3085 5830,3125 cw(c5840,3125) 5840,3135 6005,3135 cw(c6005,3125) 6015,3125 6015,3085 cw(c6005,3085) 6005,3075
NetC26_1 on Top Layer "NONET_L01_P-001" (solid, remove dead copper, pour order 38): 5295,2750 ccw(c5295,2745) 5290,2745 5290,2635 ccw(c5295,2635) 5295,2630 5430,2630 ccw(c5430,2635) 5435,2635 5435,2745 ccw(c5430,2745) 5430,2750
NetL2_1 on Top Layer "NONET_L01_P-001" (solid, remove dead copper, pour order 37): 6075,3140 ccw(c6075,3130) 6065,3130 6065,3090 ccw(c6075,3090) 6075,3080 6395,3080 ccw(c6395,3090) 6405,3090 6405,3130 ccw(c6395,3130) 6395,3140
NetC31_1 on Top Layer "NONET_L01_P-001" (solid, remove dead copper, pour order 34): 5750,3230 ccw(c5750,3220) 5740,3220 5740,3190 ccw(c5750,3190) 5750,3180 6010,3180 ccw(c6010,3190) 6020,3190 6020,3220 ccw(c6010,3220) 6010,3230
NetC27_1 on Top Layer "NONET_L01_P-001" (solid, remove dead copper, pour order 31): 5390,2800 cw(c5390,2805) 5385,2805 5385,2885 cw(c5390,2885) 5390,2890 5465,2890 cw(c5465,2885) 5470,2885 5470,2805 cw(c5465,2805) 5465,2800
NetC27_2 on Top Layer "NONET_L01_P-001" (solid, remove dead copper, pour order 30): 5480,2810 ccw(c5490,2810) 5490,2800 5535,2800 ccw(c5535,2810) 5545,2810 5545,3055 ccw(c5535,3055) 5535,3065 5490,3065 ccw(c5490,3055) 5480,3055
VCC on Top Layer "NONET_L01_P-001" (solid, remove dead copper, pour order 28): 5870,2945 cw(c5900,2945) 5900,2975 6500,2975 cw(c6500,2945) 6530,2945 6530,2700 cw(c6495,2700) 6495,2665 5905,2665 cw(c5905,2700) 5870,2700
VCC on Top Layer "NONET_L01_P-001" (solid, remove dead copper, pour order 27): 5495,2680 ccw(c5505,2680) 5505,2670 5755,2670 ccw(c5755,2680) 5765,2680 5765,2780 ccw(c5755,2780) 5755,2790 5505,2790 ccw(c5505,2780) 5495,2780
GND on Bottom Layer "GND_L04_P113" (solid, remove dead copper, pour order 113): 3850,2310 ccw(c3909.06,2310) 3909.06,2250.94 6940.94,2250.94 ccw(c6940.94,2310) 7000,2310 7000,4935 ccw(c6935.47,4934.53) 6935,4999.06 3909.06,4999.06 ccw(c3909.06,4940) 3850,4940
+5 on Bottom Layer "NONET_L01_P-001" (solid, remove dead copper, pour order 102): 5905,4085 ccw(c5935,4085) 5935,4055 6445,4055 ccw(c6445,4080) 6470,4080 6470,4195 ccw(c6445,4195) 6445,4220 6185,4220 cw(c6185,4270) 6135,4270 6135,4615 ccw(c6115,4615) 6115,4635 5925,4635 ccw(c5925,4615) 5905,4615
no net on POWER (split plane): 4979.93,2870.07 4460,2870.07 4457.06,2869.78 4454.23,2868.93 4451.63,2867.53 4449.34,2865.66 4447.47,2863.37 4446.07,2860.77 4445.22,2857.94 4444.93,2855 4444.93,2580 4445.22,2577.06 4446.07,2574.23 4447.47,2571.63 4449.34,2569.34 4451.63,2567.47 4454.23,2566.07 4457.06,2565.22 4460,2564.93 5534.93,2564.93 5534.93,2271.04 3909.06,2271.04 3908.57,2270.99 3903.96,2271.3 3898.95,2272.29 3894.12,2273.93 3889.54,2276.19 3885.29,2279.03 3881.45,2282.4 3878.08,2286.23 3875.25,2290.48 3872.99,2295.06 3871.35,2299.9 3870.35,2304.9 3870.05,2309.51 3870.1,2310 3870.1,2984.93 4979.93,2984.93
3.3V on POWER (split plane): 3909.06,4978.96 6484.93,4978.96 6484.93,4260.07 6065,4260.07 6062.06,4259.78 6059.23,4258.93 6056.63,4257.53 6054.34,4255.66 6052.47,4253.37 6051.07,4250.77 6050.22,4247.94 6049.93,4245 6049.93,3370.07 4995,3370.07 4992.06,3369.78 4989.23,3368.93 4986.63,3367.53 4984.34,3365.66 4982.47,3363.37 4981.07,3360.77 4980.22,3357.94 4979.93,3355 4979.93,3015.07 3870.1,3015.07 3870.1,4940 3870.05,4940.49 3870.35,4945.1 3871.35,4950.1 3872.99,4954.94 3875.25,4959.52 3878.08,4963.77 3881.45,4967.6 3885.29,4970.97 3889.54,4973.81 3894.12,4976.07 3898.95,4977.71 3903.96,4978.7 3908.57,4979.01
VCC on POWER (split plane): 6979.9,2310 6979.95,2309.51 6979.65,2304.9 6978.65,2299.9 6977.01,2295.06 6974.75,2290.48 6971.92,2286.23 6968.55,2282.4 6964.71,2279.03 6960.46,2276.19 6955.88,2273.93 6951.05,2272.29 6946.04,2271.3 6941.44,2270.99 6940.94,2271.04 5565.07,2271.04 5565.07,2974.93 6979.9,2974.93
+5 on POWER (split plane): 6484.93,3005.07 5550,3005.07 5547.06,3004.78 5544.23,3003.93 5541.63,3002.53 5539.34,3000.66 5537.47,2998.37 5536.07,2995.77 5535.22,2992.94 5534.93,2990 5534.93,2595.07 4475.07,2595.07 4475.07,2839.93 4995,2839.93 4997.94,2840.22 5000.77,2841.07 5003.37,2842.47 5005.66,2844.34 5007.53,2846.63 5008.93,2849.23 5009.78,2852.06 5010.07,2855 5010.07,3339.93 6065,3339.93 6067.94,3340.22 6070.77,3341.07 6073.37,3342.47 6075.66,3344.34 6077.53,3346.63 6078.93,3349.23 6079.78,3352.06 6080.07,3355 6080.07,4229.93 6484.93,4229.93
no net on POWER (split plane): 6941.28,4978.67 6947,4977.53 6952.51,4975.66 6957.73,4973.09 6962.58,4969.85 6966.96,4966.01 6970.8,4961.63 6974.03,4956.79 6976.61,4951.57 6978.48,4946.05 6979.62,4940.34 6979.94,4935.38 6979.9,4935 6979.9,3005.07 6515.07,3005.07 6515.07,4245 6515.07,4978.96 6935,4978.96 6935.76,4979.03
GND on GROUND (split plane): 6941.28,4978.67 6947,4977.53 6952.51,4975.66 6957.73,4973.09 6962.58,4969.85 6966.96,4966.01 6970.8,4961.63 6974.03,4956.79 6976.61,4951.57 6978.48,4946.05 6979.62,4940.34 6979.94,4935.38 6979.9,4935 6979.9,2310 6979.95,2309.51 6979.65,2304.9 6978.65,2299.9 6977.01,2295.06 6974.75,2290.48 6971.92,2286.23 6968.55,2282.4 6964.71,2279.03 6960.46,2276.19 6955.88,2273.93 6951.05,2272.29 6946.04,2271.3 6941.44,2270.99 6940.94,2271.04 3909.06,2271.04 3908.57,2270.99 3903.96,2271.3 3898.95,2272.29 3894.12,2273.93 3889.54,2276.19 3885.29,2279.03 3881.45,2282.4 3878.08,2286.23 3875.25,2290.48 3872.99,2295.06 3871.35,2299.9 3870.35,2304.9 3870.05,2309.51 3870.1,2310 3870.1,4940 3870.05,4940.49 3870.35,4945.1 3871.35,4950.1 3872.99,4954.94 3875.25,4959.52 3878.08,4963.77 3881.45,4967.6 3885.29,4970.97 3889.54,4973.81 3894.12,4976.07 3898.95,4977.71 3903.96,4978.7 3908.57,4979.01 3909.06,4978.96 6935,4978.96 6935.76,4979.03

## Other copper
POWER (plane layer: these items are gaps in the copper):
  lines w30: 3850,3000 4995,3000 ; 5550,2580 4460,2580 4460,2855 4995,2855 4995,3355 6065,3355 6065,4245 6500,4245 ; 6500,2990 6500,4245 ; 6500,5000 6500,4245 ; 5550,2255 7000,2255 7000,2990 5550,2990 5550,2255

## Silkscreen, mask and mechanical layers (free items; w line width, h text height)
Top Overlay:
  text "SCL" at 5900,4670 h20
  text "CAN_H" at 6445,4643.33 h20
  text "SWCLK" at 5270,4635 h20
  text "3.3V" at 5715,4625 h20
  text "5V" at 6100,4615 h20
  text "GND" at 6190,4615 h20
  text "SDA" at 6280,4615 h20
  text "CAN_L" at 6445,4553.33 h20
  text "SWDIO" at 5525,4550 h20
  text "GND" at 5655,4550 h20
  text "RX" at 6560,4300 h20
  text "5V" at 6560,4175 h20
  text "GND" at 6560,4105 h20
  text "TX" at 6560,4025 h20
  text "3.3V" at 4310,2890 h20
  text "SCK" at 4310,2840 h20
  text "MISO" at 4310,2785 h20
  text "MOSI" at 4310,2720 h20
Mechanical 1:
  the board outline again, w10